# Altium PCB MB1280.PcbDoc
Units mil, origin at the board's own origin, x right, y up, seen from the top; angles counter-clockwise.
Board outline 2155.03 x 1780.03 mil, 2 copper layers (Top Layer, Bottom Layer), stack 61.855 mil thick; 26 components, 23 nets, 119 pads, 19 vias.
Unrouted connection lines stored in the file: 8.
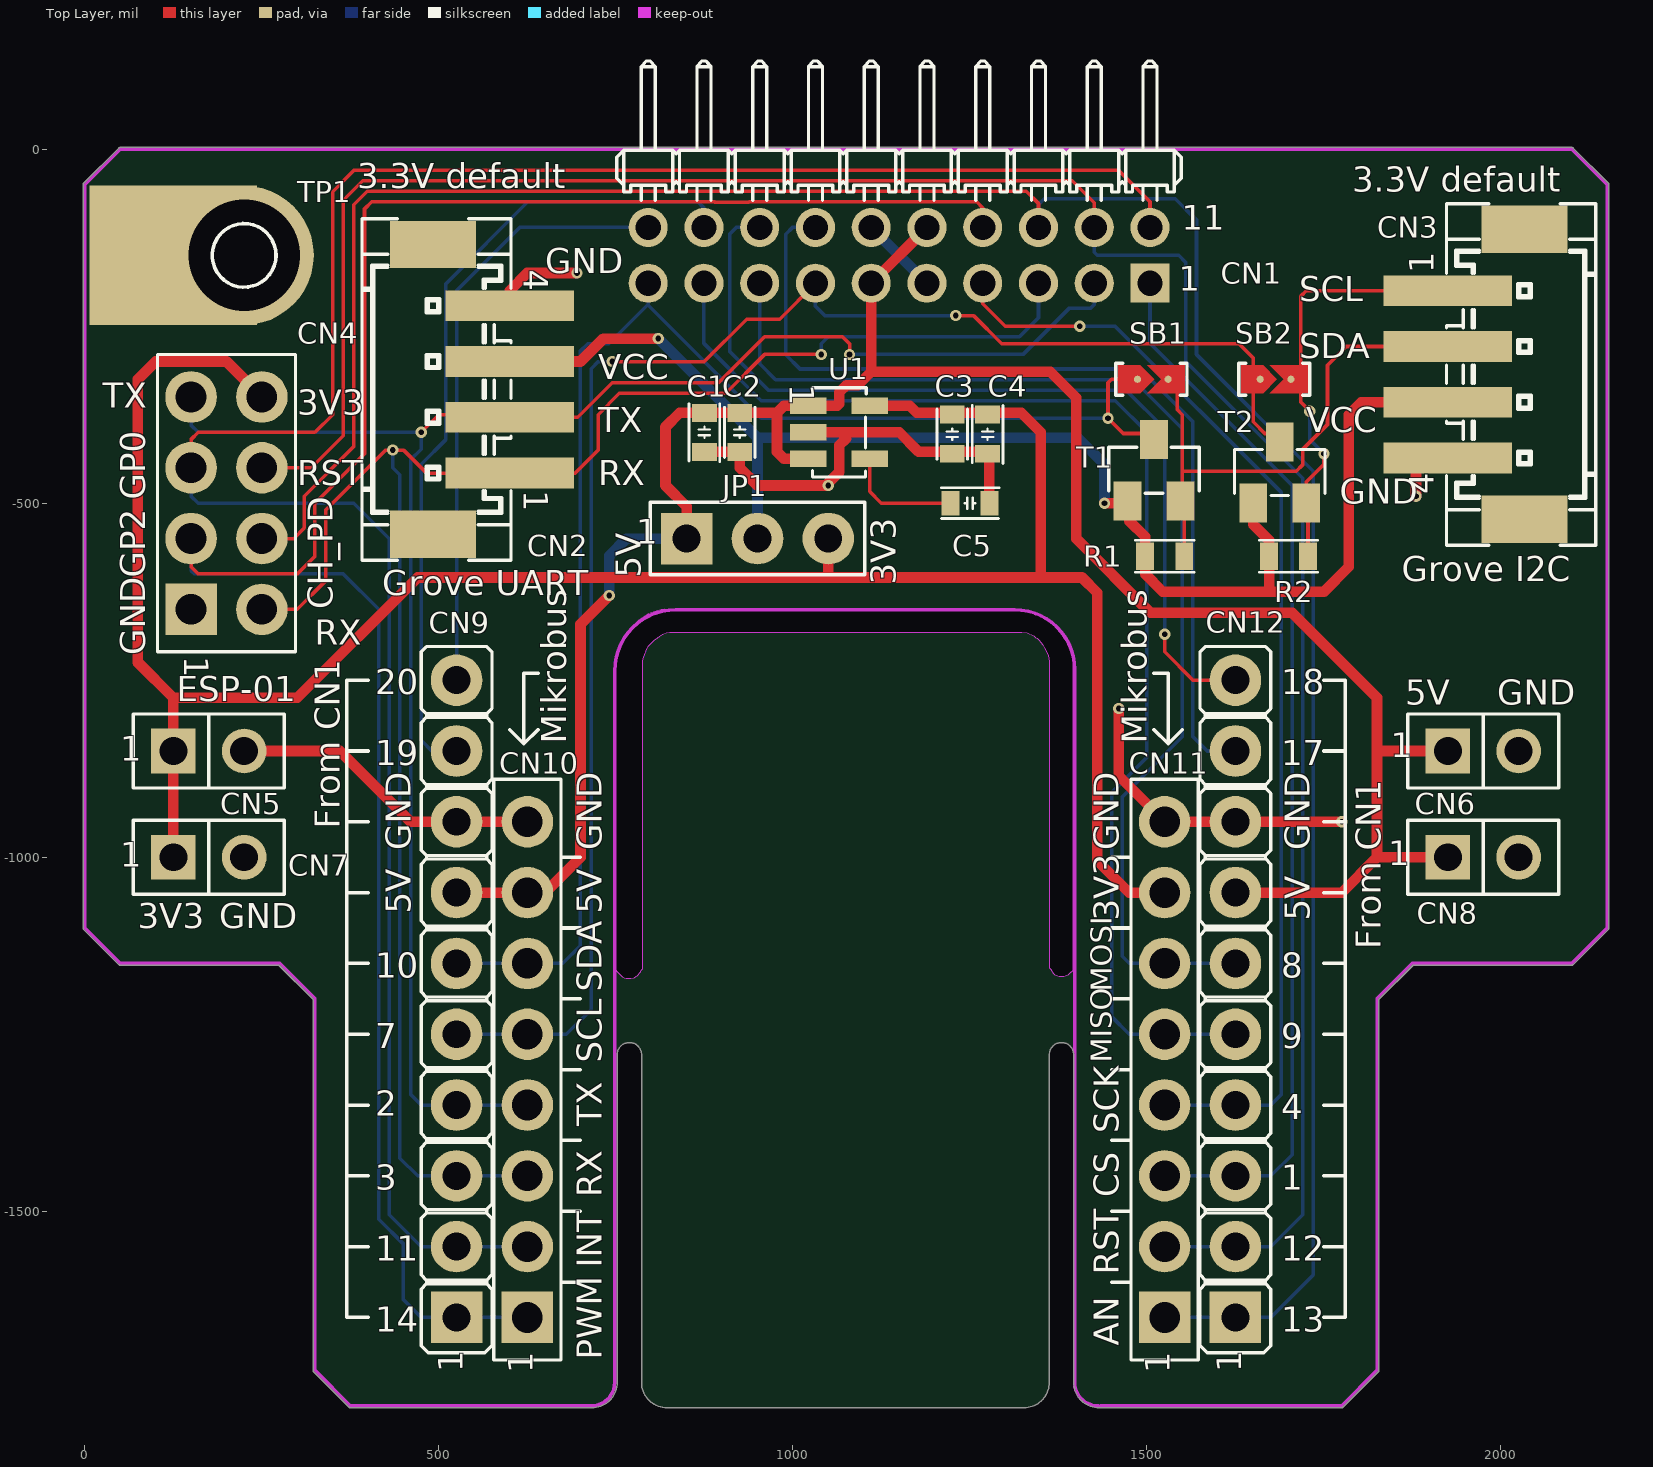
[diagram p0: Top Layer view]
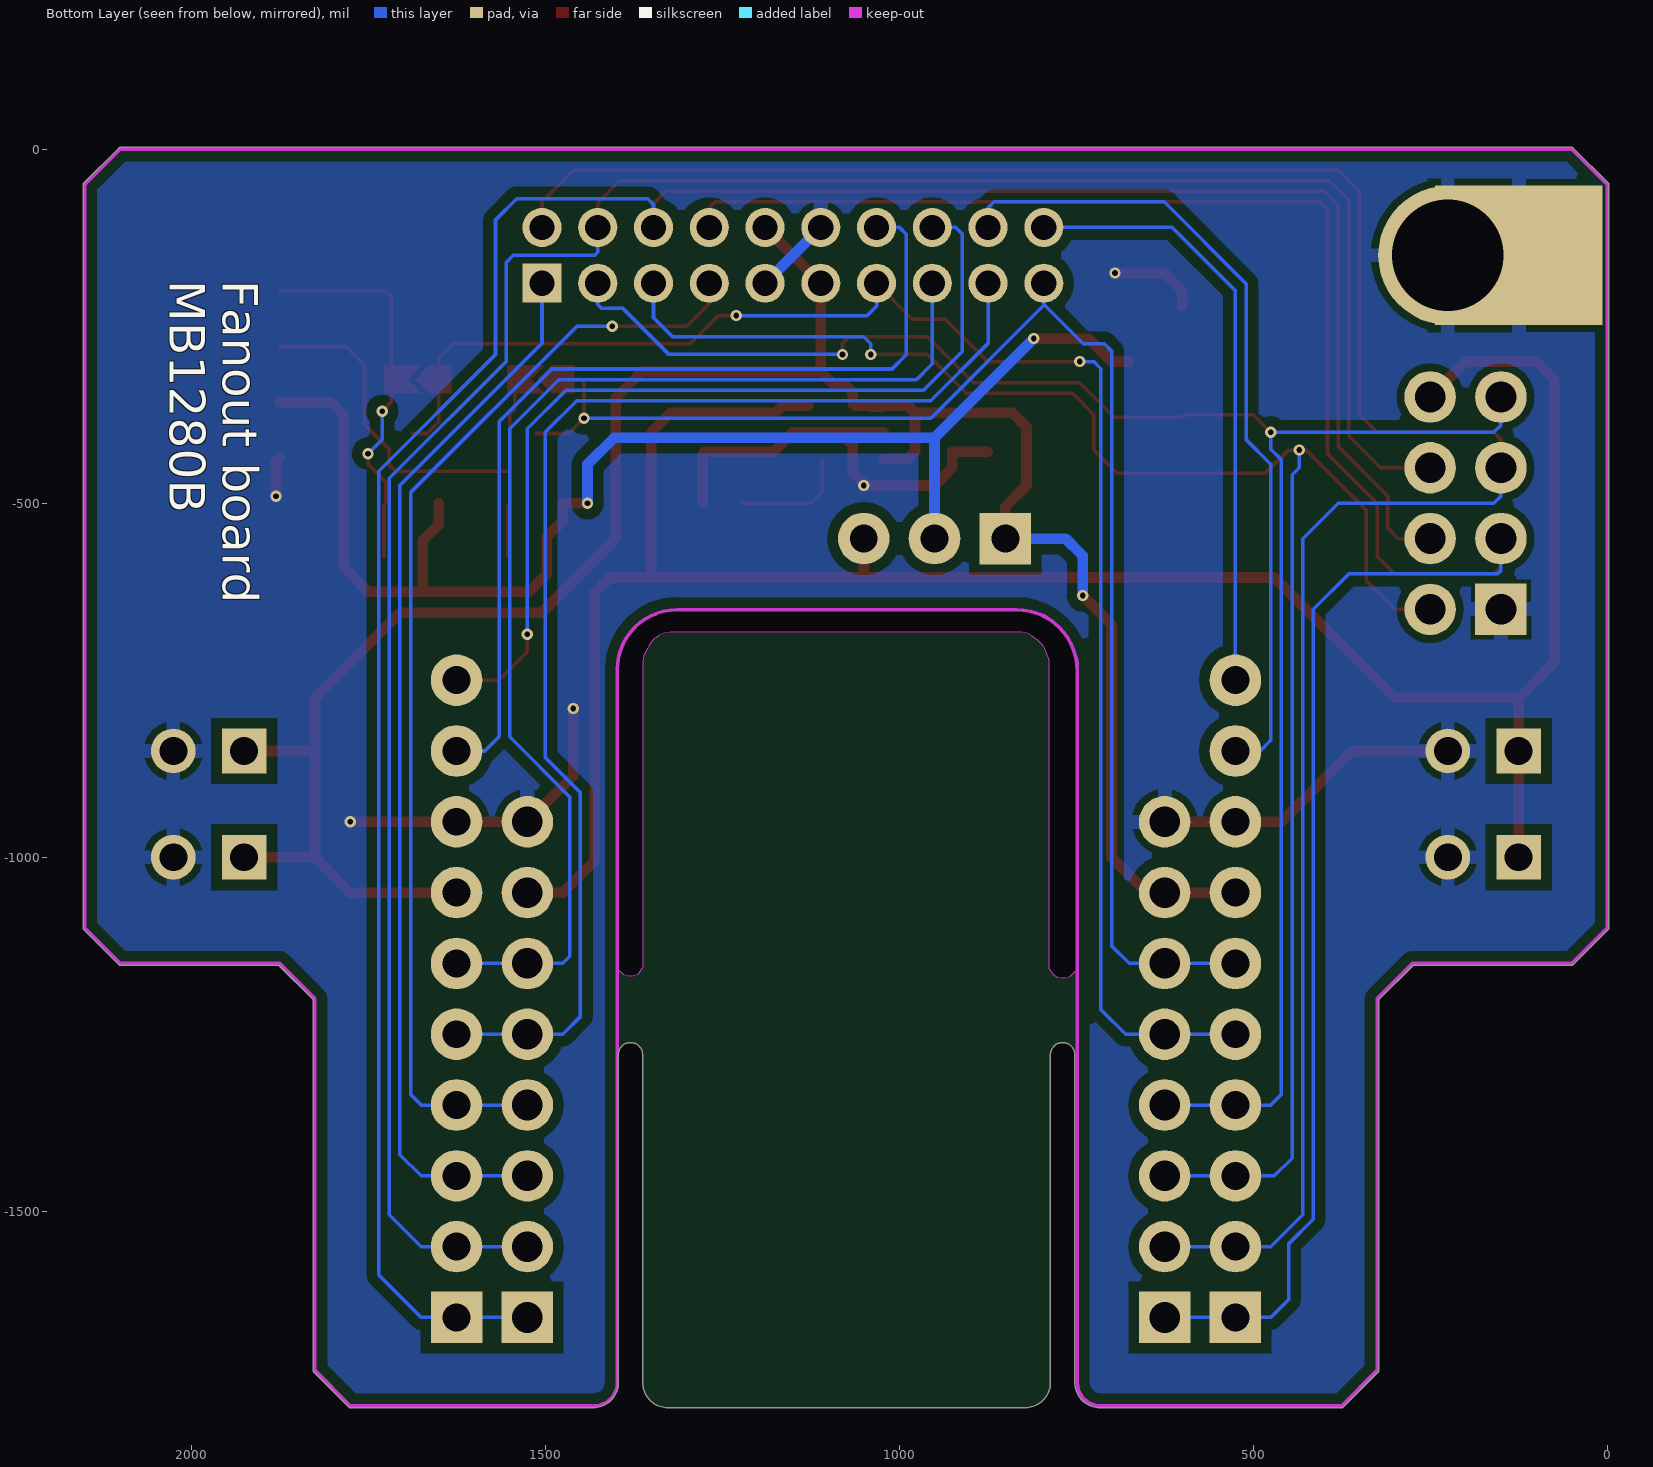
[diagram p1: Bottom Layer view, seen from below]
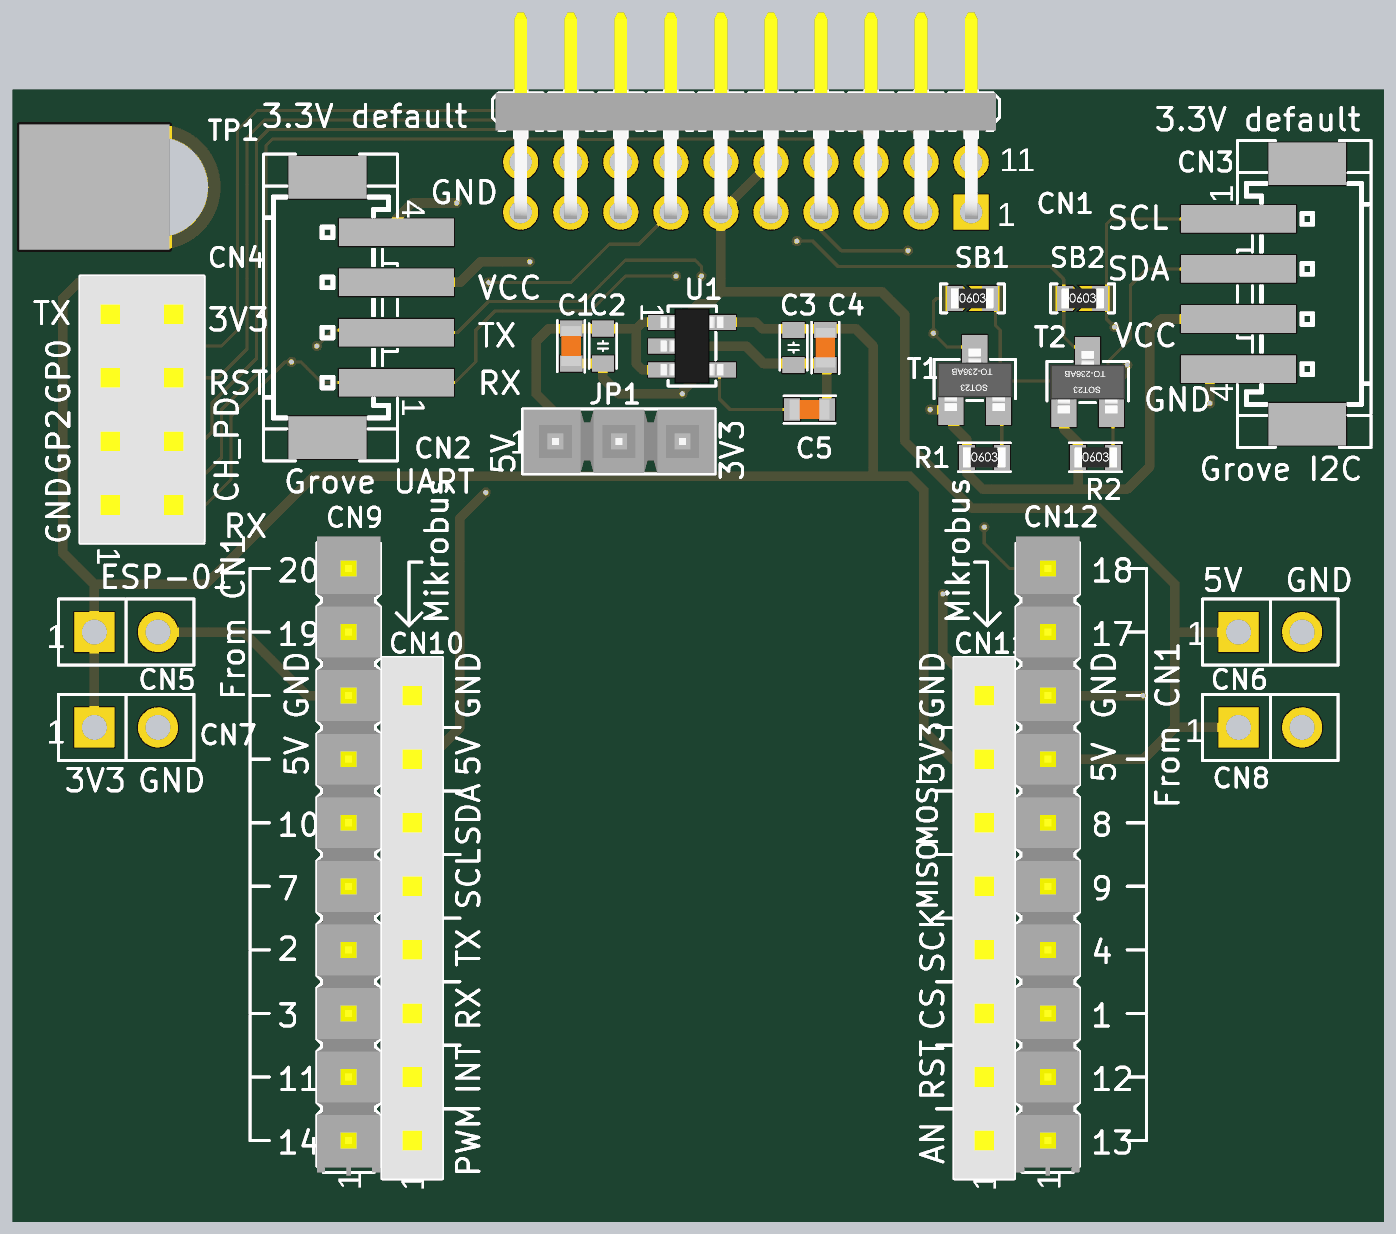
[diagram p2: 3D render of the assembled board from above, using the file's embedded part models]

## Layer stack, top to bottom
Top Solder: solder mask 0.4, Solder Resist, Dk 3.5
Top Layer: signal copper 1.4
Dielectric1: core 59.0551, FR-4, Dk 4.8
Bottom Layer: signal copper 1.4
Bottom Solder: solder mask 0.4, Solder Resist, Dk 3.5

## Board outline
373.22,-1776.78 ccw(c375,-1775) 375,-1777.52 716.09,-1777.52 ccw(c716.09,-1741.68) 751.92,-1741.68 751.92,-1280.32 ccw(c749.41,-1280.32) 751.83,-1279.63 ccw(c749.41,-1278.94) 751.92,-1278.94 cw(c769.09,-1278.94) 786.26,-1278.94 ccw(c788.78,-1278.94) 786.36,-1279.63 ccw(c788.78,-1280.32) 786.26,-1280.32 786.26,-1741.68 cw(c788.78,-1741.68) 786.26,-1741.68 cw(c788.78,-1741.68) 786.26,-1741.68 ccw(c822.1,-1741.68) 822.1,-1777.52 1326.32,-1777.52 ccw(c1326.32,-1741.68) 1362.16,-1741.68 1362.16,-1280.32 ccw(c1359.65,-1280.32) 1362.06,-1279.63 ccw(c1359.65,-1278.94) 1362.16,-1278.94 cw(c1379.33,-1278.94) 1396.5,-1278.94 ccw(c1399.02,-1278.94) 1396.6,-1279.63 ccw(c1399.02,-1280.32) 1396.5,-1280.32 1396.5,-1741.68 ccw(c1399.02,-1741.68) 1396.5,-1741.71 ccw(c1432.34,-1741.68) 1432.34,-1777.52 1775,-1777.52 ccw(c1775,-1775) 1776.78,-1776.78 1826.78,-1726.78 ccw(c1825,-1725) 1827.51,-1725 1827.51,-1201.04 1876.04,-1152.52 2100,-1152.52 ccw(c2100,-1150) 2101.78,-1151.78 2151.78,-1101.78 ccw(c2150,-1100) 2152.51,-1100 2152.51,-50 ccw(c2150,-50) 2151.78,-48.22 2101.78,1.78 ccw(c2100,0) 2100,2.51 50,2.51 ccw(c50,0) 48.22,1.78 -1.78,-48.22 ccw(c0,-50) -2.51,-50 -2.51,-1100 ccw(c0,-1100) -1.78,-1101.78 48.22,-1151.78 ccw(c50,-1150) 50,-1152.52 273.96,-1152.52 322.49,-1201.04 322.49,-1725 ccw(c325,-1725) 323.22,-1726.78
cut-out: 747,-1149.05 748.04,-1154.11 750,-1159.07 751.93,-1162 753,-1163.07 759,-1169.07 762,-1170.07 765,-1171.07 769,-1171.07 771,-1171.07 776,-1170.07 779.07,-1168 780,-1167.07 785,-1162.07 786.07,-1160 787.78,-1157.29 787.78,-1155.85 787.78,-722.29 789.05,-717.28 794.07,-705.07 796,-702.07 805,-693.07 806,-692.07 809,-690.07 812,-688.07 816,-685.07 817.44,-684.44 821,-683.07 826,-681.96 827.11,-681.96 1319.89,-681.96 1322.99,-682.07 1331,-683.07 1339.87,-687.13 1341.37,-688.63 1342.82,-690.07 1345,-691.07 1347,-693.07 1353,-700.25 1355,-704 1360.81,-714.88 1362.06,-724.14 1362.06,-1156.06 1364,-1158 1365.94,-1162 1368,-1164.06 1370,-1166.07 1375.92,-1168 1382.28,-1168 1388.99,-1166.07 1391,-1164.06 1393.06,-1162 1394,-1162 1396,-1160 1396,-719.07 1393,-710.07 1392,-706.07 1388.99,-700.06 1386.36,-694.82 1383.62,-692.07 1380,-685.07 1378,-683.07 1371.21,-676.28 1369,-673.07 1359,-666.07 1352,-662.07 1348.09,-659.84 1342.82,-658 1338,-655.07 1335,-654.07 1328.08,-651.76 1325.39,-650.46 826.61,-650.46 819,-650.07 814,-650.46 809,-652.07 805,-653.07 803,-654.07 800,-655.07 795,-657.07 792.04,-659.04 788.85,-661.14 784.17,-664.25 781.42,-666.07 768.24,-679.25 760,-691.51 759,-693 758,-694 755.01,-700.06 754.02,-702.07 753,-705.07 751.92,-707.98 751,-710.07 750.95,-711.07 750,-714.46 749.07,-717.02 748.04,-721.04 747,-725.07

## Design rules (kind name [scope] priority, off if disabled: settings)
Clearance Clearance_1 [(InPoly)] p1: gap=15 ignorepadtopadclearanceinfootprint=FALSE except(0: Arc-Hole Track-Hole SMDPad-Hole THPad-Hole Via-Hole Fill-Hole Poly-Hole Region-Hole Text-Hole)
FabricationTestPointUsage TestPointUsage [All] p1: valid=0 allowmultiple=FALSE
FabricationTestpoint Testpoint [(IsPad And (OnTopLayer Or OnBottomLayer))] p1: side=3 testpointundercomponent=TRUE minsize=40 maxsize=100 preferedsize=60 minholesize=0 maxholesize=40 preferedholesize=32 testpointgrid=1 allowsidetop=TRUE allowsidebottom=TRUE usegrid=TRUE gridtolerance=0.01
HoleSize [All] p1: absolutevalues=TRUE maxlimit=150 minlimit=1 maxpercent=80.000 minpercent=20.000
PolygonConnect PolygonConnect_1 [IsVia] p1: connectstyle=Direct reliefconductorwidth=20 reliefentries=4 polygonreliefangle="90 Angle" airgapwidth=10
PolygonConnect [All] p2: connectstyle=Relief reliefconductorwidth=20 reliefentries=4 polygonreliefangle="90 Angle" airgapwidth=10
RoutingLayers [All] p1: top layer_v5=FALSE bottom layer_v5=FALSE
RoutingVias [All] p1: holewidth=13 width=25 viastyle="Through Hole" minholewidth=8 minwidth=16 maxholewidth=28 maxwidth=50
SilkToSolderMaskClearance SilkscreenOverComponentPads [IsPad] p1: minsilkscreentomaskgap=10 clearancetoexposedcopper=TRUE
SolderMaskExpansion [All] p1: expansion=4
Width Width_1 [InNet('VDD_MCU')] p1: maxlimit=100 minlimit=6 preferedwidth=12
Width [All] p2: maxlimit=100 minlimit=5 preferedwidth=5 minimp=50.000000 maximp=50.000000 favimp=50.000000
25 further rules are at their usual default settings.

## Components (designator, comment, footprint, x,y, rotation, side; value= is the part's Value field where it differs from the comment)
C1 "Capacitor" C0603 875,-400 r90 top value=100nF
C2 "Capacitor" C0603_H0P8 925,-400 r90 top value="1uF, 50V"
C3 "Capacitor" C0603_H0P8 1225,-402.56 r90 top value="1uF, 50V"
C4 "Capacitor" C0603 1275,-402.56 r90 top value=100nF
C5 "Capacitor" C0603 1250.06,-500 r180 top value="10nF, 50V"
CN1 "Header 10x2 STMod+" CON_SAMTEC_TMM-110-01-L-D-RA__STMOD+ 1150,-60.63 r180 top
CN2 "Header 4x1" CON_988-JIUBABA_A2006LF-04A 491.73,-339.37 r270 top
CN3 "Header 4x1" CON_988-JIUBABA_A2006LF-04A 2033.27,-318.11 r90 top
CN4 "Socket 4x2" CON_SAMTEC_SSW-104-01-X-D 200,-500 r270 top
CN5 "Header 2x1" CON_988-JIUBABA_PHFS25-11-02-G0B115-T-1 175,-850 r180 top value="header 2x1"
CN6 "Header 2x1" CON_988-JIUBABA_PHFS25-11-02-G0B115-T-1 1975,-850 r180 top value="header 2x1"
CN7 "Header 2x1" CON_988-JIUBABA_PHFS25-11-02-G0B115-T-1 175,-1000 r180 top value="header 2x1"
CN8 "Header 2x1" CON_988-JIUBABA_PHFS25-11-02-G0B115-T-1 1975,-1000 r180 top value="header 2x1"
CN9 "Header 10x1" CON_SAMTEC_TSW-110-14-G-S 525,-1200 r90 top value=TSW-110-14-G-S
CN10 "Socket 8x1" CON_SAMTEC_SSW-108-01-X-S 625,-1300 r90 top
CN11 "Socket 8x1" CON_SAMTEC_SSW-108-01-X-S 1525,-1300 r90 top
CN12 "Header 10x1" CON_SAMTEC_TSW-110-14-G-S 1625,-1200 r90 top value=TSW-110-14-G-S
JP1 "Jumper_Header 3x1 Fitted 2-3" CON_SAMTEC_TSW-103-07-F-S 950,-550 r0 top value="Shunt Fitted 2-3"
R1 "Resistor" R0603 1525.06,-575 r0 top value=4K7
R2 "Resistor" R0603 1700,-575 r0 top value=4K7
SB1 "SB_ON" SOLDER-BRIDGE_R0603-0R 1506.38,-325 r0 top
SB2 "SB_ON" SOLDER-BRIDGE_R0603-0R 1679.68,-325 r0 top
T1 "BSN20" MOS_SOT23 1510,-453.31 r0 top
T2 "BSN20" MOS_SOT23 1687.6,-456.69 r0 top
TP1 "Test_Point_PTH_1mm_2mm" TP_C4MM_PAD 225,-150 r0 top value=GND
U1 "LDK120M33R" REG_SOT23-5L 1065.16,-400 r270 top

## Footprints (in the part's own frame and the unit in brackets; to place one, negate y for a bottom-side part, rotate by r counter-clockwise, add the part's x,y. Pads: shape width x height; smd on the part's side, far side on the other; paste and mask are expansions set on the pad)
C0603 [mm]
  rect 0.64x0.89 smd mask+0.05: 1(-0.7,0) 2(0.7,0)
  silkscreen extent -1.05,-0.55 1.02,0.55, body extent -0.9,-0.5 0.9,0.5, height 1.4
C0603_H0P8 [mm] "MCD-01540"
  rect 0.64x0.89 smd mask+0.05: 1(-0.7,0) 2(0.7,0)
  silkscreen extent -0.9,-0.55 0.9,0.55, body extent -0.9,-0.5 0.9,0.5, height 1
CON_988-JIUBABA_A2006LF-04A [mm] "MCD-01741"
  rect 1.7x3.1 smd mask+0.05: 0(-5.2,0) 0(5.2,0)
  rect 1.1x4.6 smd mask+0.05: 1(3,2.75) 2(1,2.75) 3(-1,2.75) 4(-3,2.75)
  silkscreen extent -6.12,-2.55 6.12,2.8, body extent -6.12,-2.55 6.12,4, height 8.35
CON_988-JIUBABA_PHFS25-11-02-G0B115-T-1 [mm]
  rect 1.6x1.6 hole 1 mask+0.05: 1(1.27,0)
  round 1.6 hole 1 mask+0.05: 2(-1.27,0)
  silkscreen extent -2.71,-1.33 2.71,1.33, body extent -2.71,-1.33 2.71,1.33, height 8.85
CON_SAMTEC_SSW-104-01-X-D [mm] "MCD-01742"
  rect 1.85x1.85 / inner round 1.85 / far side rect 1.85x1.85 hole 1.1 mask+0.05: 1(3.81,-1.27)
  round 1.85 hole 1.1 mask+0.05: 2(3.81,1.27) 3(1.27,-1.27) 4(1.27,1.27) 5(-1.27,-1.27) 6(-1.27,1.27) 7(-3.81,-1.27) 8(-3.81,1.27)
  silkscreen extent -5.34,-2.47 5.34,2.47, body extent -5.34,-2.48 5.34,2.48, height 8.51
CON_SAMTEC_SSW-108-01-X-S [mm] "MCD-01743"
  rect 1.85x1.85 / inner round 1.85 / far side rect 1.85x1.85 hole 1.1 mask+0.05: 1(-8.89,0)
  round 1.85 hole 1.1 mask+0.05: 2(-6.35,0) 3(-3.81,0) 4(-1.27,0) 5(1.27,0) 6(3.81,0) 7(6.35,0) 8(8.89,0)
  silkscreen extent -10.42,-1.2 10.42,1.2, body extent -10.42,-1.21 10.42,1.21, height 8.51
CON_SAMTEC_TMM-110-01-L-D-RA__STMOD+ [mm]
  rect 1.4x1.4 hole 0.9 mask+0.05: 1(-9,3.27)
  round 1.4 hole 0.9 mask+0.05: 2(-7,3.27) 3(-5,3.27) 4(-3,3.27) 5(-1,3.27) 6(1,3.27) 7(3,3.27) 8(5,3.27) 9(7,3.27) 10(9,3.27) 11(-9,1.27) 12(-7,1.27) 13(-5,1.27) 14(-3,1.27) 15(-1,1.27) 16(1,1.27) 17(3,1.27) 18(5,1.27) 19(7,1.27) 20(9,1.27)
  silkscreen extent -10.12,-4.7 10.13,0.3, body extent -10.15,-6.35 10.15,3.52, height 4
CON_SAMTEC_TSW-103-07-F-S [mm]
  rect 1.85x1.85 / inner round 1.85 / far side rect 1.85x1.85 hole 1 mask+0.05: 1(-2.54,0)
  round 1.85 hole 1 mask+0.05: 2(0,0) 3(2.54,0)
  silkscreen extent -3.85,-1.3 3.85,1.3, body extent -3.91,-1.37 3.91,1.37, height 8.38
CON_SAMTEC_TSW-110-14-G-S [mm] "MCD-01591"
  rect 1.85x1.85 / inner round 1.85 / far side rect 1.85x1.85 hole 1 mask+0.05: 1(-11.43,0)
  round 1.85 hole 1 mask+0.05: 2(-8.89,0) 3(-6.35,0) 4(-3.81,0) 5(-1.27,0) 6(1.27,0) 7(3.81,0) 8(6.35,0) 9(8.89,0) 10(11.43,0)
  silkscreen extent -12.7,-1.27 12.64,1.27, body extent -12.83,-1.27 12.7,1.27, height 10.67
MOS_SOT23 [mm]
  rect 1x1.4 smd mask+0.05: 1(-0.95,-1.1) 2(0.95,-1.1) 3(0,1.1)
  silkscreen extent -1.63,-0.82 1.63,0.82, body extent -1.56,-1.25 1.56,1.25, height 1.1
R0603 [mm]
  rect 0.64x1 smd mask+0.05: 1(-0.7,0) 2(0.7,0)
  silkscreen extent -1.05,-0.58 1.05,0.58, body extent -0.9,-0.5 0.9,0.5, height 0.56
REG_SOT23-5L [mm]
  rect 0.6x1.3 smd mask+0.05: 1(-0.95,-1.1) 2(0,-1.1) 3(0.95,-1.1) 4(0.95,1.1) 5(-0.95,1.1)
  silkscreen extent -1.6,-0.95 1.6,0.97, body extent -1.52,-1.25 1.52,1.25, height 1.1
SOLDER-BRIDGE_R0603-0R [mil]
  round 10 smd paste-393.7: 1(-19.69,0) 2(23.62,0)
  Top Layer region: -5.91,19.68 13.78,0 -5.91,-19.69 47.24,-19.69 47.24,19.68 -5.91,19.68
  Top Layer region: -47.24,-19.69 -47.24,19.68 -15.75,19.68 3.94,0 -15.75,-19.69 -47.24,-19.69
  silkscreen extent -50,-23 50,23, body extent -36,-20 36,20, height 22
TP_C4MM_PAD [mm]
  rect 6x5 smd: 1(-2.54,0)
  rect 6x5 smd far side: 1(-2.54,0)
  round 5 hole 4: 1(0,0)
  silkscreen extent -1.14,-1.14 1.14,1.14

## Part data
C1 C4: library part MCD-00211, "Capacitor, MLCC, 100nF, 16V, X7R, 10%, 0603, T=0,8mm", Manufacturer=YAGEO, Manufacturer_Part_Number=CC0603KRX7R7BB104, Package=C0603, ComponentLink1Description=Datasheet, ComponentLink1URL=http://tunmcdsvn.tun.st.com/Component_Datasheet_Library/Trunk/Capacitors/Yageo_Multilayer_Capacitor_X7R_series_100pF_to_22uF, Internal_Part_Number=MCD-00211, Part_Type=Capacitor, Provided_By=SUBCO, Status=Released
C2 C3: library part MCD-01703, "Capacitor,1uF,50V,X5R,10%,0603, T=0.8mm", Manufacturer=YAGEO, Manufacturer_Part_Number=CC0603KRX5R9BB105, Package=C0603, ComponentLink1Description=Datasheet, ComponentLink1URL=http://tunmcdsvn.tun.st.com/Component_Datasheet_Library/Trunk/Capacitors/Yageo_Multilayer_capacitor_X5R_series_100pF_to_100uF/YAGEO_MLCC_UPY-GPHC_X5R_4V-to-50V_25.pdf, Internal_Part_Number=MCD-01703, Part_Type=Capacitor, Provided_By=SUBCO, Status="Footprint available"
C5: library part MCD-01102, "Capacitor,10nF,50V,X7R,10%,0603", Manufacturer=YAGEO, Manufacturer_Part_Number=CC0603KRX7R9BB103, Package=C0603, ComponentLink1Description=Datasheet, ComponentLink1URL=http://tunmcdsvn.tun.st.com/Component_Datasheet_Library/Trunk/Capacitors/Yageo_Multilayer_Capacitor_X7R_series_100pF_to_22uF/Yageo_Mutilayer_Capacitor_X7R_100pF_to_22uF.pdf, Internal_Part_Number=MCD-01102, Part_Type=Capacitor, Provided_By=SUBCO, Status="Footprint available"
CN1: library part MCD-00288, "Header 10x2, 2mm, RA, TH, Height 3.20mm/3.50mm", Manufacturer=SAMTEC, Manufacturer_Part_Number=TMM-110-01-L-D-RA, ComponentLink1Description=Datasheet, ComponentLink1URL=http://tunmcdsvn.tun.st.com/Component_Datasheet_Library/Trunk/Connectors/Samtec_tmm_th_series, Internal_Part_Number=MCD-00288, Part_Type=Connector, Provided_By=SUBCO, Status=Released
CN2 CN3: library part MCD-01741, "Header 4x1, 2mm, VR, SMT", Manufacturer=Jiubaba, Manufacturer_Part_Number=A2006LF-04A, ComponentLink1Description=Datasheet, ComponentLink1URL=http://tunmcdsvn.tun.st.com/Component_Datasheet_Library/Trunk/Connectors/Jiubaba_A2006LF-0xA/988_A2006LF-0xA.pdf, Internal_Part_Number=MCD-01741, Part_Type=Connector, Provided_By=SUBCO, Status="Footprint available"
CN4: library part MCD-01742, "Socket 4x2,2.54mm,VR,TH, height 8.51/2.64mm", Alternate_Manufacturer=Jiubaba, Alternate_Manufacturer_Part_Number=218108S1610, Manufacturer=SAMTEC, Manufacturer_Part_Number=SSW-104-01-G-D, ComponentLink1Description=Datasheet, ComponentLink1URL=http://tunmcdsvn.tun.st.com/Component_Datasheet_Library/Trunk/Connectors/Samtec_SSW-SSQ-series/Samtec_SSW-SSQ-series.pdf, Internal_Part_Number=MCD-01742, Part_Type=Connector, Provided_By=SUBCO, Status="Footprint available"
CN5 CN6 CN7 CN8: library part MCD-00314, "Header, 2x1, 2.54mm, VR, TH, Height 6mm/3mm", Manufacturer=JIUBABA, Manufacturer_Part_Number=PHFS25-11-02-G0B115-T-1, ComponentLink1Description=Datasheet, ComponentLink1URL=http://tunmcdsvn.tun.st.com/Component_Datasheet_Library/Trunk/Connectors/Jiubaba_PHFS25_11XXXXXXXXXX, Internal_Part_Number=MCD-00314, Part_Type=Connector, Provided_By=SUBCO, Status=Released
CN9 CN12: library part MCD-01591, "Header 10x1, 2,54mm height  10.67mm", Manufacturer=SAMTEC, Manufacturer_Part_Number=TSW-110-14-G-S, ComponentLink1Description=Datasheet, ComponentLink1URL=http://tunmcdsvn.tun.st.com/Component_Datasheet_Library/Trunk/Connectors/Samtec_TSW-HTSW-series/Samtec_TSW-HTSW-series.pdf, Internal_Part_Number=MCD-01591, Part_Type=Connector, Provided_By=SUBCO, Status="Footprint available"
CN10 CN11: library part MCD-01743, "Socket 8x1, 2.54mm, VR, TH, height 8.51/2.64mm", Alternate_Manufacturer=Jiubaba, Alternate_Manufacturer_Part_Number=FH25404D-14000, Manufacturer=SAMTEC, Manufacturer_Part_Number=SSW-108-01-x-S, ComponentLink1Description=Datasheet, ComponentLink1URL=http://tunmcdsvn.tun.st.com/Component_Datasheet_Library/Trunk/Connectors/Samtec_SSW-SSQ-series/Samtec_SSW-SSQ-series.pdf, Internal_Part_Number=MCD-01743, Part_Type=Connector, Provided_By=SUBCO, Status="Footprint available"
JP1: library part MCD-00685, "Header, 3x1, 2,54mm, VR, TH, Height 5.84mm/2.54mm - Shunt Fitted 2-3 by default", Manufacturer=SAMTEC, Manufacturer_Part_Number=TSW-103-07-F-S, ComponentLink1Description=Datasheet, ComponentLink1URL=http://tunmcdsvn.tun.st.com/Component_Datasheet_Library/Trunk/Connectors/Samtec_TSW-HTSW-series, Internal_Part_Number=MCD-00685, Part_Type=Connector, Provided_By=SUBCO, Status=Released
R1 R2: library part MCD-00219, "Resistor,4K7,0603,1%,1/10W", Manufacturer=YAGEO, Manufacturer_Part_Number=RC0603FR-074K7L, Package=R0603, ComponentLink1Description=Datasheet, ComponentLink1URL=http://tunmcdsvn.tun.st.com/Component_Datasheet_Library/Trunk/Resistors/Yageo_Resistor_RC0603-series, Internal_Part_Number=MCD-00219, Part_Type=Resistor, Provided_By=SUBCO, Status=Released
SB1 SB2: library part MCD-00071, "Solder Bridge ON", Manufacturer=YAGEO, Manufacturer_Part_Number=RC0603JR-070RL, Package=SB0603, ComponentLink1Description=Datasheet, ComponentLink1URL=http://tunmcdsvn.tun.st.com/Component_Datasheet_Library/Trunk/Resistors/Yageo_Resistor_RC0603-series, Internal_Part_Number=MCD-00071, Part_Type=Mechanical, Provided_By=SUBCO, Status=Released
T1 T2: library part MCD-00151, "N-channel enhancement mode field-effect transistor", Manufacturer=NXP, ComponentLink1Description=Datasheet, ComponentLink1URL=http://tunmcdsvn.tun.st.com/Component_Datasheet_Library/Trunk/IC/NXP_Transistor_BSN20BK_SOT23, Internal_Part_Number=MCD-00151, Manufacturer_Part_Number=BSN20, Part_Type=IC, Provided_By=SUBCO, Status=Released
TP1: library part MCD-01506, "Test Point trought hole 1mm/2mm", Manufacturer=n/a, ComponentLink1Description=Datasheet, ComponentLink1URL=n/a, Internal_Part_Number=MCD-01506, Manufacturer_Part_Number=n/a, Part_Type=Mechanical, Provided_By=n/a, Status=Released
U1: library part MCD-00663, "200 mA low quiescent current very low noise LDO", Manufacturer=STMICROELECTRONICS, Package=SOT23-5L, BMS_Part_Number=9176330, ComponentLink1Description=Datasheet, ComponentLink1URL=http://tunmcdsvn.tun.st.com/Component_Datasheet_Library/Trunk/IC/STM_LDO_LDK120M33R, Internal_Part_Number=MCD-00663, Manufacturer_Part_Number=LDK120M33R, Part_Type=IC, Provided_By="SUBCO with ST control", Status="Footprint available"

## Via types
v1: diameter 16, hole 8, Top Layer to Bottom Layer, tented both sides, 19 vias

## Nets (pads, with @x,y where several pads share a name; then routed paths per layer and width w, separated by ;. In a path a pad name is that pad's centre, name@x,y a point inside that pad or via, vN(x,y) a via of type N, cw(c..) or ccw(c..) an arc to the next point about the centre after c; other vN are vias at no path point)
+3V3: C3.2 C4.2 CN4.8 CN5.1 CN7.1 CN11.7 JP1.3 U1.5 | length 3275.5
  Top Layer w15: CN7.1 CN5.1 125,-775 ; CN4.8 200,-300 100,-300 75,-325 75,-725 125,-775 ; JP1.3 1050,-605 ; U1.5@1128.15,-362.6 1165.1,-362.6 1175,-372.5 1322.5,-372.5 1350,-400 1350,-605 ; CN11.7 1475,-1050 1430,-1005 1430,-626.72 1408.28,-605 1350,-605 ; 125,-775 300,-775 470,-605 1050,-605 ; 1050,-605 1350,-605
+5V: C1.2 C2.2 CN1.6 CN1.15 CN6.1 CN8.1 CN9.7 CN10.7 CN12.7 JP1.1 U1.1 U1.3 | length 3266.7
  Top Layer w15: CN9.7 CN10.7 650,-1050 700,-1000 700,-671.01 v1(740.51,-630.5) ; JP1.1 850,-505 820,-475 820,-392.5 840,-372.5 977.5,-372.5 ; U1.3 987.4,-437.4 977.5,-427.5 977.5,-372.5 ; U1.1 987.4,-362.6 977.5,-372.5 ; U1.1@1022.66,-363.41 1038.64,-363.41 1039.45,-362.6 1062.4,-362.6 1065.37,-359.63 1065.37,-343.54 1075.63,-333.29 1091.71,-333.29 1110.63,-314.37 ; CN1.15 CN1.6 1110.63,-314.37 ; CN12.7 1775,-1050 1825,-1000 ; CN8.1 1825,-1000 ; CN6.1 1825,-850 ; 1110.63,-314.37 1363.31,-314.37 1400,-351.06 1400,-550 1505,-655 1705,-655 1825,-775 1825,-850 ; 1825,-1000 1825,-850
  Bottom Layer w15: v1(740.51,-630.5) 740.51,-574.49 765,-550 JP1.1
GND: C1.1 C2.1 C3.1 C4.1 C5.1 CN1.5 CN1.16 CN2.4 CN3.4 CN4.1 CN5.2 CN6.2 CN7.2 CN8.2 CN9.8 CN10.8 CN11.8 CN12.8 TP1.1 U1.2 | length 1803.5
  Top Layer w15: CN5.2 360,-850 460,-950 CN9.8 CN10.8 ; CN2.4 600,-200 625,-175 v1(695,-175) ; C1.1 C2.1 C2.1 925,-450 950,-475 v1(1050,-475) 1050,-471.4 1065.37,-456.03 1065.37,-418.34 1075,-408.72 1075,-400 ; U1.2 1075,-400 ; C5.1@1277.5,-500 1277.5,-430 1275,-427.5 1177.5,-427.5 1150,-400 1075,-400 ; v1(1460,-790) 1460,-885 CN11.8 CN12.8 v1(1775,-950) ; CN3.4@1875,-436.22 1880,-441.22 v1(1880,-490)
  Bottom Layer w15: CN1.16 CN1.5
I2C_SCL: CN3.1 R2.2 SB2.2 T2.2 | length 553
  Top Layer w5: R2.2 1727.5,-502.5 T2.2 1725,-470 1750,-445 v1(1750,-430) ; v1(1730,-370) 1717.5,-357.5 1717.5,-207.5 1725,-200 CN3.1@1875,-200
  Bottom Layer w5: v1(1730,-370) 1730,-410 v1(1750,-430)
I2C_SDA: CN3.2 R1.2 SB1.2 T1.2 | length 714.2
  Top Layer w5: 1542.5,-325 1542.5,-367.5 1550,-375 1550,-455 ; R1.2@1552.5,-575 1552.5,-502.5 1550,-500 1550,-455 ; CN3.2@1875,-278.74 1781.26,-278.74 1755,-305 1755,-388.94 1719.78,-424.15 1719.78,-446.12 1710.91,-455 1550,-455
NetC5_2: C5.2 U1.4 | length 166.9
  Top Layer w5: U1.4 1108.46,-483.46 1125,-500 C5.2
STMOD#1: CN1.1 CN11.3 CN12.3 | length 1506.2
  Bottom Layer w5: CN1.1 1504.33,-274.33 1705,-475 1705,-1420 1675,-1450 CN12.3 CN11.3
STMOD#2: CN1.2 CN2.2 CN4.4 CN9.4 CN10.4 | length 2569.6
  Top Layer w5: v1(475,-400) 500,-375 596.26,-375 CN2.2 696.26,-378.74 745,-330 895,-330 960,-265 1070,-265 1080,-275 v1(1080,-290)
  Bottom Layer w5: 150,-350 150,-390 160,-400 v1(475,-400) 475,-423.79 460,-438.79 460,-1335 475,-1350 CN9.4 CN10.4 ; v1(1080,-290) 1324.96,-290 1389.96,-225 1420,-225 1425.59,-219.41 CN1.2
STMOD#3: CN1.3 CN2.1 CN4.5 CN9.3 CN10.3 | length 2634.3
  Top Layer w5: 250,-650 300,-650 340,-610 340,-510 425,-425 v1(435,-425) 450,-425 482.48,-457.48 CN2.1 692.52,-457.48 725,-425 725,-375 755,-345 905,-345 960,-290 v1(1040,-290)
  Bottom Layer w5: v1(435,-425) 435,-450 445,-460 445,-1425 470,-1450 CN9.3 CN10.3 ; v1(1040,-290) 1040,-275 1050,-265 1320,-265 1346.85,-238.15 CN1.3
STMOD#4: CN1.4 CN11.4 CN12.4 | length 1582.4
  Top Layer w5: CN1.4 1268.11,-218.11 1300,-250 v1(1405,-250)
  Bottom Layer w5: v1(1405,-250) 1455,-250 1690,-485 1690,-1335 1675,-1350 CN12.4 CN11.4
STMOD#7: CN1.7 CN9.5 CN10.5 SB2.1 T2.3 | length 2291.7
  Top Layer w5: v1(745,-300) 875,-300 935,-240 981.26,-240 CN1.7 ; v1(1230,-235) 1255,-235 1295,-275 1630,-275 1650,-295 1650,-385 1666.58,-401.58 T2.3@1687.6,-401.58
  Bottom Layer w5: CN9.5 CN10.5 680,-1250 715,-1215 715,-310 725,-300 v1(745,-300) ; CN1.7 1031.89,-221.89 1045,-235 v1(1230,-235)
STMOD#8: CN1.8 CN11.6 CN12.6 | length 1693
  Bottom Layer w5: CN1.8 953.15,-303.15 975.5,-325.5 1480.5,-325.5 1550,-395 1550,-830 1465,-915 1465,-1140 1475,-1150 CN11.6 CN12.6
STMOD#9: CN1.9 CN11.5 CN12.5 | length 1793.7
  Bottom Layer w5: CN1.9 874.41,-274.41 955.5,-355.5 1455.5,-355.5 1500,-400 1500,-858.79 1450,-908.79 1450,-1225 1475,-1250 CN11.5 CN12.5
STMOD#10: CN1.10 CN9.6 CN10.6 SB1.1 T1.3 | length 2052.9
  Top Layer w5: 1475,-325 1450,-325 1445,-330 v1(1445,-380) 1466.58,-401.58 T1.3@1512.6,-401.58
  Bottom Layer w5: CN9.6 CN10.6 675,-1150 700,-1125 700,-285.04 710.04,-275 740,-275 794.33,-220.67 795.67,-220.67 ; CN1.10 795.67,-220.67 ; v1(1445,-380) 955,-380 795.67,-220.67
STMOD#11: CN1.11 CN4.3 CN9.2 CN10.2 | length 3304.8
  Top Layer w5: 150,-450 150,-410 160,-400 325,-400 350,-375 350,-60 380.49,-29.51 1459.51,-29.51 1504.33,-74.33 CN1.11
  Bottom Layer w5: 150,-450 150,-490 160,-500 380,-500 430,-550 430,-1505 475,-1550 CN9.2 CN10.2
STMOD#12: CN1.12 CN4.7 CN11.2 CN12.2 | length 3383.8
  Top Layer w5: 250,-450 320,-450 365,-405 365,-72.08 392.57,-44.51 1394.51,-44.51 1425.59,-75.59 CN1.12
  Bottom Layer w5: CN1.12 1425.59,-145.59 1430,-150 1545,-150 1555,-160 1555,-300 1720,-465 1720,-1505 1675,-1550 CN12.2 CN11.2
STMOD#13: CN1.13 CN4.6 CN11.1 CN12.1 | length 3632.1
  Top Layer w5: 250,-550 295,-550 310,-535 310,-490 380,-420 380,-78.29 398.79,-59.51 1329.51,-59.51 1346.85,-76.85 CN1.13
  Bottom Layer w5: CN1.13 1346.85,-78.15 1355,-70 1540,-70 1570,-100 1570,-290 1735,-455 1735,-1590 1675,-1650 CN12.1 CN11.1
STMOD#14: CN1.14 CN4.2 CN9.1 CN10.1 | length 3165.4
  Top Layer w5: 150,-550 150,-590 160,-600 300,-600 325,-575 325,-500 395,-430 395,-84.51 405,-74.51 889.37,-74.51 889.86,-75 937.7,-75 938.19,-74.51 1259.51,-74.51 1268.11,-83.11 CN1.14
  Bottom Layer w5: 150,-550 150,-595 155,-600 365,-600 415,-650 415,-1511.21 450,-1546.21 450,-1625 475,-1650 CN9.1 CN10.1
STMOD#17: CN1.17 CN12.9 | length 1343.7
  Bottom Layer w5: CN1.17 999.37,-110.63 990,-120 990,-290.5 1010,-310.5 1490.5,-310.5 1565,-385 1565,-830 1585,-850 CN12.9
STMOD#18: CN1.18 CN12.10 | length 1303.4
  Top Layer w5: v1(1525,-685) 1525,-710 1565,-750 CN12.10
  Bottom Layer w5: CN1.18 919.9,-110.63 910.53,-120 910.53,-285.53 965.5,-340.5 1470.5,-340.5 1525,-395 v1(1525,-685)
STMOD#19: CN1.19 CN9.9 | length 1159.1
  Bottom Layer w5: CN9.9 490,-850 475,-835 475,-445 510,-410 510,-190 625.49,-74.51 865.83,-74.51 874.41,-83.08 CN1.19
STMOD#20: CN1.20 CN9.10 | length 857.7
  Bottom Layer w5: CN9.10 525,-200 614.37,-110.63 CN1.20
VCC: CN2.3 CN3.3 JP1.2 R1.1 R2.1 T1.1 T2.1 | length 1950.2
  Top Layer w15: CN2.3@675,-300 700,-300 732.48,-267.52 v1(810,-267.52) ; v1(1440,-500) 1475.2,-500 1475.2,-525.2 1497.5,-547.5 R1.1 1497.5,-600 1522.5,-625 1750,-625 1785,-590 1785,-375 1802.52,-357.48 CN3.3@1875,-357.48 ; T2.1 1650.2,-530.2 1672.5,-552.5 1672.5,-622.5
  Bottom Layer w15: v1(810,-267.52) 950,-407.52 ; JP1.2 950,-407.52 ; v1(1440,-500) 1440,-445 1402.52,-407.52 950,-407.52
pads on no net: CN2.0 CN3.0

## Polygon pours and split planes (outlines as drawn)
GND on Bottom Layer "GND_L02_P008" (solid, remove dead copper, pour order 8): -25,25 2175,25 2175,-1800 -25,-1800

## Keep-outs
Keep-Out Layer:
  lines w5: 1431.25,-1775 cw(c1431.25,-1741.68) 1397.93,-1741.68 1397.93,-1280.32 1397.93,-734.98 ccw(c1313.34,-734.98) 1313.34,-650.39 834.72,-650.39 ccw(c834.72,-736.79) 748.32,-736.79 748.32,-1280.32 748.32,-1741.68 cw(c715,-1741.68) 715,-1775 375,-1775 325,-1725 325,-1200 275,-1150 50,-1150 0,-1100 0,-50 50,0 2100,0 2150,-50 2150,-1100 2100,-1150 1875,-1150 1825,-1200 1825,-1725 1775,-1775 1435,-1775

## Silkscreen, mask and mechanical layers (free items; w line width, h text height)
Top Overlay:
  lines w5: 370,-1550 400,-1550 ; 370,-1450 400,-1450 ; 370,-1350 400,-1350 ; 370,-1250 400,-1250 ; 370,-1150 400,-1150 ; 370,-1050 400,-1050 ; 370,-950 400,-950 ; 370,-850 400,-850 ; 400,-1650 370,-1650 370,-750 400,-750 ; 600,-820 620,-840 ; 640,-820 620,-840 ; 640,-740 620,-740 620,-840 ; 675,-1600 700,-1600 ; 675,-1500 700,-1500 ; 675,-1400 700,-1400 ; 675,-1300 700,-1300 ; 675,-1200 700,-1200 ; 675,-1100 700,-1100 ; 675,-1000 700,-1000 ; 1450,-1600 1475,-1600 ; 1450,-1500 1475,-1500 ; 1450,-1400 1475,-1400 ; 1450,-1300 1475,-1300 ; 1450,-1200 1475,-1200 ; 1450,-1100 1475,-1100 ; 1450,-1000 1475,-1000 ; 1510,-820 1530,-840 ; 1510,-740 1530,-740 1530,-840 ; 1550,-820 1530,-840 ; 1750,-1650 1780,-1650 1780,-750 1750,-750 ; 1750,-1550 1780,-1550 ; 1750,-1450 1780,-1450 ; 1750,-1350 1780,-1350 ; 1750,-1250 1780,-1250 ; 1750,-1150 1780,-1150 ; 1750,-1050 1780,-1050 ; 1750,-950 1780,-950 ; 1750,-850 1780,-850
  text "3.3V default" at 385,-55 h35
  text "3.3V default" at 1790,-60 h35
  text "GND" at 650,-175 h35
  text "SCL" at 1715,-215 h35
  text "SDA" at 1715,-295 h35
  text "VCC" at 725,-325 h35
  text "TX" at 25,-365 h35
  text "3V3" at 300,-375 h35
  text "TX" at 725,-400 h35
  text "VCC" at 1725,-400 h35
  text "RST" at 300,-475 h35
  text "RX" at 725,-475 h35
  text "GP0" at 85,-495 h35 r90
  text "GND" at 1772.6,-500.79 h35
  text "GP2" at 85,-605 h35 r90
  text "5V" at 785,-605 h35 r90
  text "Grove I2C" at 1860,-610 h35
  text "3V3" at 1145,-615 h35 r90
  text "Grove UART" at 420,-630 h35
  text "CH_PD" at 350,-650 h35 r90
  text "RX" at 325,-700 h35
  text "GND" at 85,-715 h35 r90
  text "20" at 410,-770 h35
  text "18" at 1690,-770 h35
  text "ESP-01" at 130,-780 h35
  text "5V" at 1865,-785 h35
  text "GND" at 1995,-785 h35
  text "Mikrobus" at 680,-840 h35 r90
  text "Mikrobus" at 1500,-840 h35 r90
  text "19" at 410,-870 h35
  text "17" at 1690,-870 h35
  text "From CN1" at 360,-960 h35 r90
  text "GND" at 460,-990 h35 r90
  text "GND" at 730,-990 h35 r90
  text "GND" at 1460,-990 h35 r90
  text "GND" at 1730,-990 h35 r90
  text "5V" at 460,-1080 h35 r90
  text "5V" at 730,-1080 h35 r90
  text "3V3" at 1460,-1090 h35 r90
  text "5V" at 1730,-1090 h35 r90
  text "3V3" at 75,-1100 h35
  text "GND" at 190,-1100 h35
  text "From CN1" at 1830,-1130 h35 r90
  text "10" at 410,-1170 h35
  text "8" at 1690,-1170 h35
  text "SDA" at 730,-1190 h35 r90
  text "MOSI" at 1450,-1190 h30 r90
  text "7" at 410,-1270 h35
  text "9" at 1690,-1270 h35
  text "SCL" at 730,-1290 h35 r90
  text "MISO" at 1450,-1290 h30 r90
  text "2" at 410,-1365 h35
  text "4" at 1690,-1370 h35
  text "TX" at 730,-1380 h35 r90
  text "SCK" at 1460,-1390 h35 r90
  text "3" at 410,-1470 h35
  text "1" at 1690,-1470 h35
  text "RX" at 730,-1480 h35 r90
  text "CS" at 1460,-1480 h35 r90
  text "11" at 410,-1570 h35
  text "12" at 1690,-1570 h35
  text "INT" at 730,-1580 h35 r90
  text "RST" at 1460,-1590 h35 r90
  text "14" at 410,-1670 h35
  text "13" at 1690,-1670 h35
  text "AN" at 1460,-1690 h35 r90
  text "PWM" at 730,-1710 h35 r90
Bottom Overlay:
  text "Fanout board" at 1955,-185 h50 r90
  text "MB1280B" at 2030,-185 h50 r90
M1-Board Shape:
  lines w5: 749.41,-1280.32 749.41,-1741.68 cw(c716.09,-1741.68) 716.09,-1775 375,-1775 325,-1725 325,-1200 275,-1150 50,-1150 0,-1100 0,-50 50,0 2100,0 2150,-50 2150,-1100 2100,-1150 1875,-1150 1825,-1200 1825,-1725 1775,-1775 1432.34,-1775 cw(c1432.34,-1741.68) 1399.02,-1741.68 1399.02,-1280.32 ; 749.41,-1278.94 cw(c769.09,-1278.94) 788.78,-1278.94 ; 788.78,-1280.32 788.78,-1741.68 ccw(c822.1,-1741.68) 822.1,-1775 1326.32,-1775 ccw(c1326.32,-1741.68) 1359.65,-1741.68 1359.65,-1280.32 ; 1359.65,-1278.94 cw(c1379.33,-1278.94) 1399.02,-1278.94 ; 749.41,-1150.39 ccw(c769.09,-1150.39) 788.78,-1150.39 788.78,-728.74 cw(c835.63,-728.74) 835.63,-681.89 1312.8,-681.89 cw(c1312.8,-728.74) 1359.65,-728.74 1359.65,-1150.39 ccw(c1379.33,-1150.39) 1399.02,-1150.39 1399.02,-734.98 ccw(c1314.43,-734.98) 1314.43,-650.39 835.8,-650.39 ccw(c835.8,-736.79) 749.41,-736.79 749.41,-1150.39
Drill Drawing:
  drawing of 350 lines, arcs and shapes, not listed
  text "PCB SPECIFICATIONS :" at 39.72,1609.44 h118.11
  text "A.   MATERIAL :" at 39.72,1451.96 h118.11
  text "FR-4" at 1555.47,1451.96 h118.11
  text "TG-170" at 2205.08,1451.96 h118.11
  text "X  TG-150" at 2923.58,1451.96 h118.11
  text "TG-140" at 3553.5,1451.96 h118.11
  text "B.   MATERIAL FAMILY :" at 39.72,1333.85 h118.11
  text "N/A" at 1555.47,1333.85 h118.11
  text "C.   SOLDERMASK COLOR :" at 39.72,1215.74 h118.11
  text "WHITE" at 2205.08,1215.74 h118.11
  text "RED" at 2923.58,1215.74 h118.11
  text "BLACK" at 3553.5,1215.74 h118.11
  text "X BLUE" at 1565,1215 h118.11
  text "D.   SILKSCREEN COLOR :" at 39.72,1097.63 h118.11
  text "X  WHITE" at 1555.47,1097.63 h118.11
  text "YELLOW" at 2205.08,1097.63 h118.11
  text "BLACK" at 2923.58,1097.63 h118.11
  text "Blue ink PANTONE 2955" at 3553.5,1097.63 h118.11
  text "E.   SURFACE FINISH :" at 39.72,979.52 h118.11
  text "X  ENIG" at 1555.47,979.52 h118.11
  text "IMMERSION SILVER" at 2205.08,979.52 h118.11
  text "IMMERSION TIN" at 3553.5,979.52 h118.11
  text "HASL" at 1555.47,861.41 h118.11
  text "HASL (PB-FREE)" at 2205.08,861.41 h118.11
  text "GOLDEN FINGER" at 3553.5,861.41 h118.11
  text "F.   IMPEDANCE CONTROL :" at 39.72,743.3 h118.11
  text "X   NO" at 1555.47,743.3 h118.11
  text "YES  (SEE IMPEDANCE TABLE FOR DETAIL INFORMATION)" at 2205.08,743.3 h118.11
  text "G.   THROUGH VIA :" at 39.72,625.19 h118.11
  text "PLUG THE VIAS WHICH ARE COVERED WITH SOLDERMASK ONE OR TWO SIDE." at 1555.47,625.19 h118.11
  text "PLUG MATERIAL :" at 1555.47,507.08 h118.11
  text "X  SOLDERMASK" at 2559.41,507.08 h118.11
  text "NON-CONDUCTIVE EPOXY." at 3553.5,507.08 h118.11
  text "H.   STACK-UP :" at 39.72,388.97 h118.11
  text "SEE LAYER STACK-UP SEQUENCE FOR OVERALL THICKNESS." at 1555.47,388.97 h118.11
  text "Symbol" at 3052.91,121.75 h85.04
  text "Count" at 3368.1,121.75 h85.04
  text "Hole Size" at 3660.5,121.75 h85.04
  text "Plated" at 4285.63,121.75 h85.04
  text "Hole Type" at 4560.3,121.75 h85.04
  text "Drill Layer Pair" at 4968,121.75 h85.04
  text "Via/Pad" at 5756.93,121.75 h85.04
  text "Pad Shape" at 6087.87,121.75 h85.04
  text "Template" at 6525.67,121.75 h85.04
  text "Description" at 7077.11,121.75 h85.04
  text "Hole Tolerance (+)" at 7516.85,121.75 h85.04
  text "Hole Tolerance (-)" at 8210.24,121.75 h85.04
  text "Hole Length" at 8884.51,121.75 h85.04
  text "Routed Path Length" at 9353.69,121.75 h85.04
  text "1" at 3368.1,4.41 h70.87
  text "157.48mil (4.00mm)" at 3660.5,4.41 h70.87
  text "PTH" at 4285.63,4.41 h70.87
  text "Round" at 4560.3,4.41 h70.87
  text "Top Layer - Bottom Layer" at 4968,4.41 h70.87
  text "Pad" at 5756.93,4.41 h70.87
  text "Rounded" at 6087.87,4.41 h70.87
  text "c500h400m0mx0" at 6525.67,4.41 h70.87
  text "-" at 8884.51,4.41 h70.87
  text "-" at 9353.69,4.41 h70.87
  text "19" at 3368.1,-112.93 h70.87
  text "8.00mil (0.20mm)" at 3660.5,-112.93 h70.87
  text "PTH" at 4285.63,-112.93 h70.87
  text "Round" at 4560.3,-112.93 h70.87
  text "Top Layer - Bottom Layer" at 4968,-112.93 h70.87
  text "Via" at 5756.93,-112.93 h70.87
  text "Rounded" at 6087.87,-112.93 h70.87
  text "v41h20m0mx0" at 6525.67,-112.93 h70.87
  text "-" at 8884.51,-112.93 h70.87
  text "-" at 9353.69,-112.93 h70.87
  text "20" at 3368.1,-230.27 h70.87
  text "35.43mil (0.90mm)" at 3660.5,-230.27 h70.87
  text "PTH" at 4285.63,-230.27 h70.87
  text "Round" at 4560.3,-230.27 h70.87
  text "Top Layer - Bottom Layer" at 4968,-230.27 h70.87
  text "Pad" at 5756.93,-230.27 h70.87
  text "(Mixed)" at 6087.87,-230.27 h70.87
  text "(Mixed)" at 6525.67,-230.27 h70.87
  text "-" at 8884.51,-230.27 h70.87
  text "-" at 9353.69,-230.27 h70.87
  text "24" at 3368.1,-347.61 h70.87
  text "43.31mil (1.10mm)" at 3660.5,-347.61 h70.87
  text "PTH" at 4285.63,-347.61 h70.87
  text "Round" at 4560.3,-347.61 h70.87
  text "Top Layer - Bottom Layer" at 4968,-347.61 h70.87
  text "Pad" at 5756.93,-347.61 h70.87
  text "Rounded" at 6087.87,-347.61 h70.87
  text "(Mixed)" at 6525.67,-347.61 h70.87
  text "-" at 8884.51,-347.61 h70.87
  text "-" at 9353.69,-347.61 h70.87
  text "31" at 3368.1,-464.96 h70.87
  text "39.37mil (1.00mm)" at 3660.5,-464.96 h70.87
  text "PTH" at 4285.63,-464.96 h70.87
  text "Round" at 4560.3,-464.96 h70.87
  text "Top Layer - Bottom Layer" at 4968,-464.96 h70.87
  text "Pad" at 5756.93,-464.96 h70.87
  text "(Mixed)" at 6087.87,-464.96 h70.87
  text "(Mixed)" at 6525.67,-464.96 h70.87
  text "-" at 8884.51,-464.96 h70.87
  text "-" at 9353.69,-464.96 h70.87
  text "95 Total" at 3368.1,-582.3 h70.87
  text "Layer" at 3052.95,-818.04 h60
  text "Name" at 3462.86,-818.04 h60
  text "Material" at 4392.61,-818.04 h60
  text "Thickness" at 5252.37,-818.04 h60
  text "Constant" at 5902.21,-818.04 h60
  text "Board Layer Stack" at 6472.07,-818.04 h60
  text "1" at 3052.95,-938.04 h60
  text "Top Overlay" at 3462.86,-938.04 h60
  text "2" at 3052.95,-1058.04 h60
  text "Top Solder" at 3462.86,-1058.04 h60
  text "Solder Resist" at 4392.61,-1058.04 h60
  text "0.40mil" at 5252.37,-1058.04 h60
  text "3.5" at 5902.21,-1058.04 h60
  text "3" at 3052.95,-1178.04 h60
  text "Top Layer" at 3462.86,-1178.04 h60
  text "Copper" at 4392.61,-1178.04 h60
  text "1.40mil" at 5252.37,-1178.04 h60
  text "4" at 3052.95,-1298.04 h60
  text "Dielectric1" at 3462.86,-1298.04 h60
  text "FR-4" at 4392.61,-1298.04 h60
  text "59.05mil" at 5252.37,-1298.04 h60
  text "4.8" at 5902.21,-1298.04 h60
  text "5" at 3052.95,-1418.04 h60
  text "Bottom Layer" at 3462.86,-1418.04 h60
  text "Copper" at 4392.61,-1418.04 h60
  text "1.40mil" at 5252.37,-1418.04 h60
  text "6" at 3052.95,-1538.04 h60
  text "Bottom Solder" at 3462.86,-1538.04 h60
  text "Solder Resist" at 4392.61,-1538.04 h60
  text "0.40mil" at 5252.37,-1538.04 h60
  text "3.5" at 5902.21,-1538.04 h60
  text "7" at 3052.95,-1658.04 h60
  text "Bottom Overlay" at 3462.86,-1658.04 h60

## Dimensions
0,-50 to 2150,-50 on M2-Board Dimensions
2100,0 to 1775,-1775 on M2-Board Dimensions
325,-1725 to 1825,-1725 on M2-Board Dimensions
749.41,-1741.68 to 1399.02,-1741.68 on M2-Board Dimensions

## Text inside footprints (layer, text, board x,y; h text height)
CN1: Top Overlay "11" at 1549,-125 h59.06; Top Overlay "1" at 1545,-211 h59.06; Mechanical 14 "10" at 820.28,-171.85 h59.06 r180; Mechanical 14 "20" at 820.28,-94.09 h59.06 r180; Mechanical 14 "1" at 1512.2,-171.85 h59.06 r180; Mechanical 14 "11" at 1528.94,-91.14 h59.06 r180
CN2: Top Overlay "4" at 608.86,-170.08 h59.06 r270; Top Overlay "1" at 608.86,-482.09 h59.06 r270; Mechanical 14 "1" at 583.27,-449.61 h59.06 r270; Mechanical 14 "4" at 583.27,-208.46 h59.06 r270
CN3: Top Overlay "4" at 1916.14,-487.4 h59.06 r90; Top Overlay "1" at 1916.14,-175.39 h59.06 r90; Mechanical 14 "1" at 1941.73,-207.87 h59.06 r90; Mechanical 14 "4" at 1941.73,-449.02 h59.06 r90
CN4: Top Overlay "1" at 129.33,-715.94 h59.06 r270; Mechanical 14 "1" at 131,-643 h59.06 r270; Mechanical 14 "2" at 231,-637 h59.06 r270; Mechanical 14 "8" at 231.5,-336.94 h59.06 r270; Mechanical 14 "7" at 131.5,-336.44 h59.06 r270
CN5: Top Overlay "1" at 50,-875 h59.06; Mechanical 14 "1" at 131.3,-825.39 h59.06 r180; Mechanical 14 "2" at 240.94,-826.38 h59.06 r180
CN6: Top Overlay "1" at 1844,-870 h59.06; Mechanical 14 "1" at 1931.3,-825.39 h59.06 r180; Mechanical 14 "2" at 2040.94,-826.38 h59.06 r180
CN7: Top Overlay "1" at 50,-1025 h59.06; Mechanical 14 "1" at 131.3,-975.39 h59.06 r180; Mechanical 14 "2" at 240.94,-976.38 h59.06 r180
CN8: Top Overlay "1" at 1841,-1023 h59.06; Mechanical 14 "1" at 1931.3,-975.39 h59.06 r180; Mechanical 14 "2" at 2040.94,-976.38 h59.06 r180
CN9: Top Overlay "1" at 544.68,-1727.56 h59.06 r90; Mechanical 14 "1" at 544.68,-1657.48 h59.06 r90; Mechanical 14 "10" at 542.72,-776.18 h59.06 r90
CN10: Top Overlay "1" at 643.7,-1729.13 h59.06 r90; Mechanical 14 "8" at 644.69,-963.39 h59.06 r90; Mechanical 14 "1" at 643.7,-1657.48 h59.06 r90
CN11: Top Overlay "1" at 1543.7,-1729.13 h59.06 r90; Mechanical 14 "8" at 1544.69,-963.39 h59.06 r90; Mechanical 14 "1" at 1543.7,-1657.48 h59.06 r90
CN12: Top Overlay "1" at 1644.68,-1727.56 h59.06 r90; Mechanical 14 "1" at 1644.68,-1657.48 h59.06 r90; Mechanical 14 "10" at 1642.72,-776.18 h59.06 r90
JP1: Top Overlay "1" at 778.54,-568.7 h59.06; Mechanical 14 "1" at 842.52,-569.69 h59.06
U1: Top Overlay "1" at 984.45,-332.09 h59.06 r270